# EAGLE board motherboard (EAGLE 5.10)
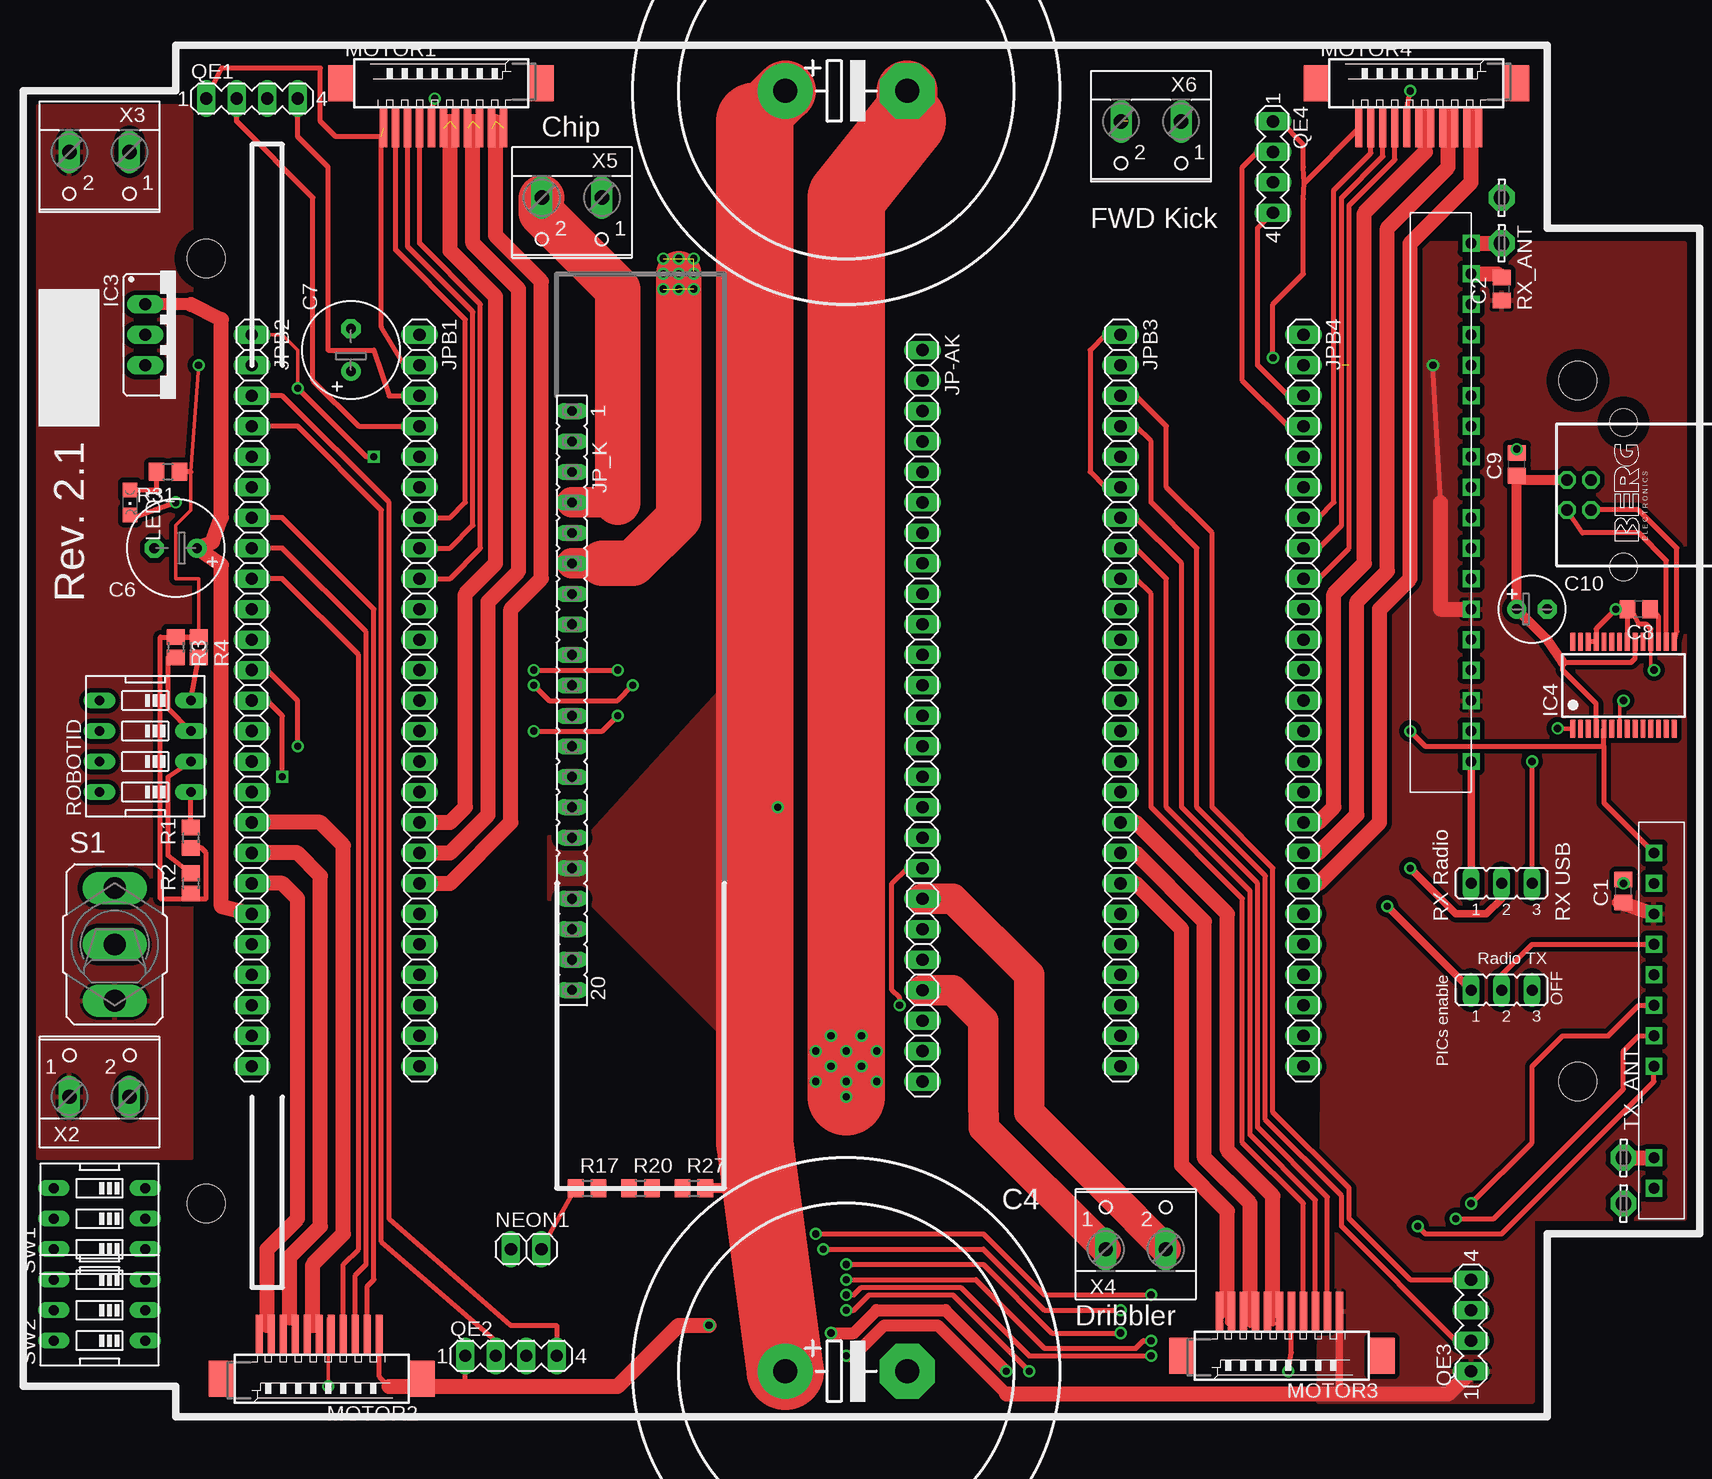
[diagram p0: board, top side]
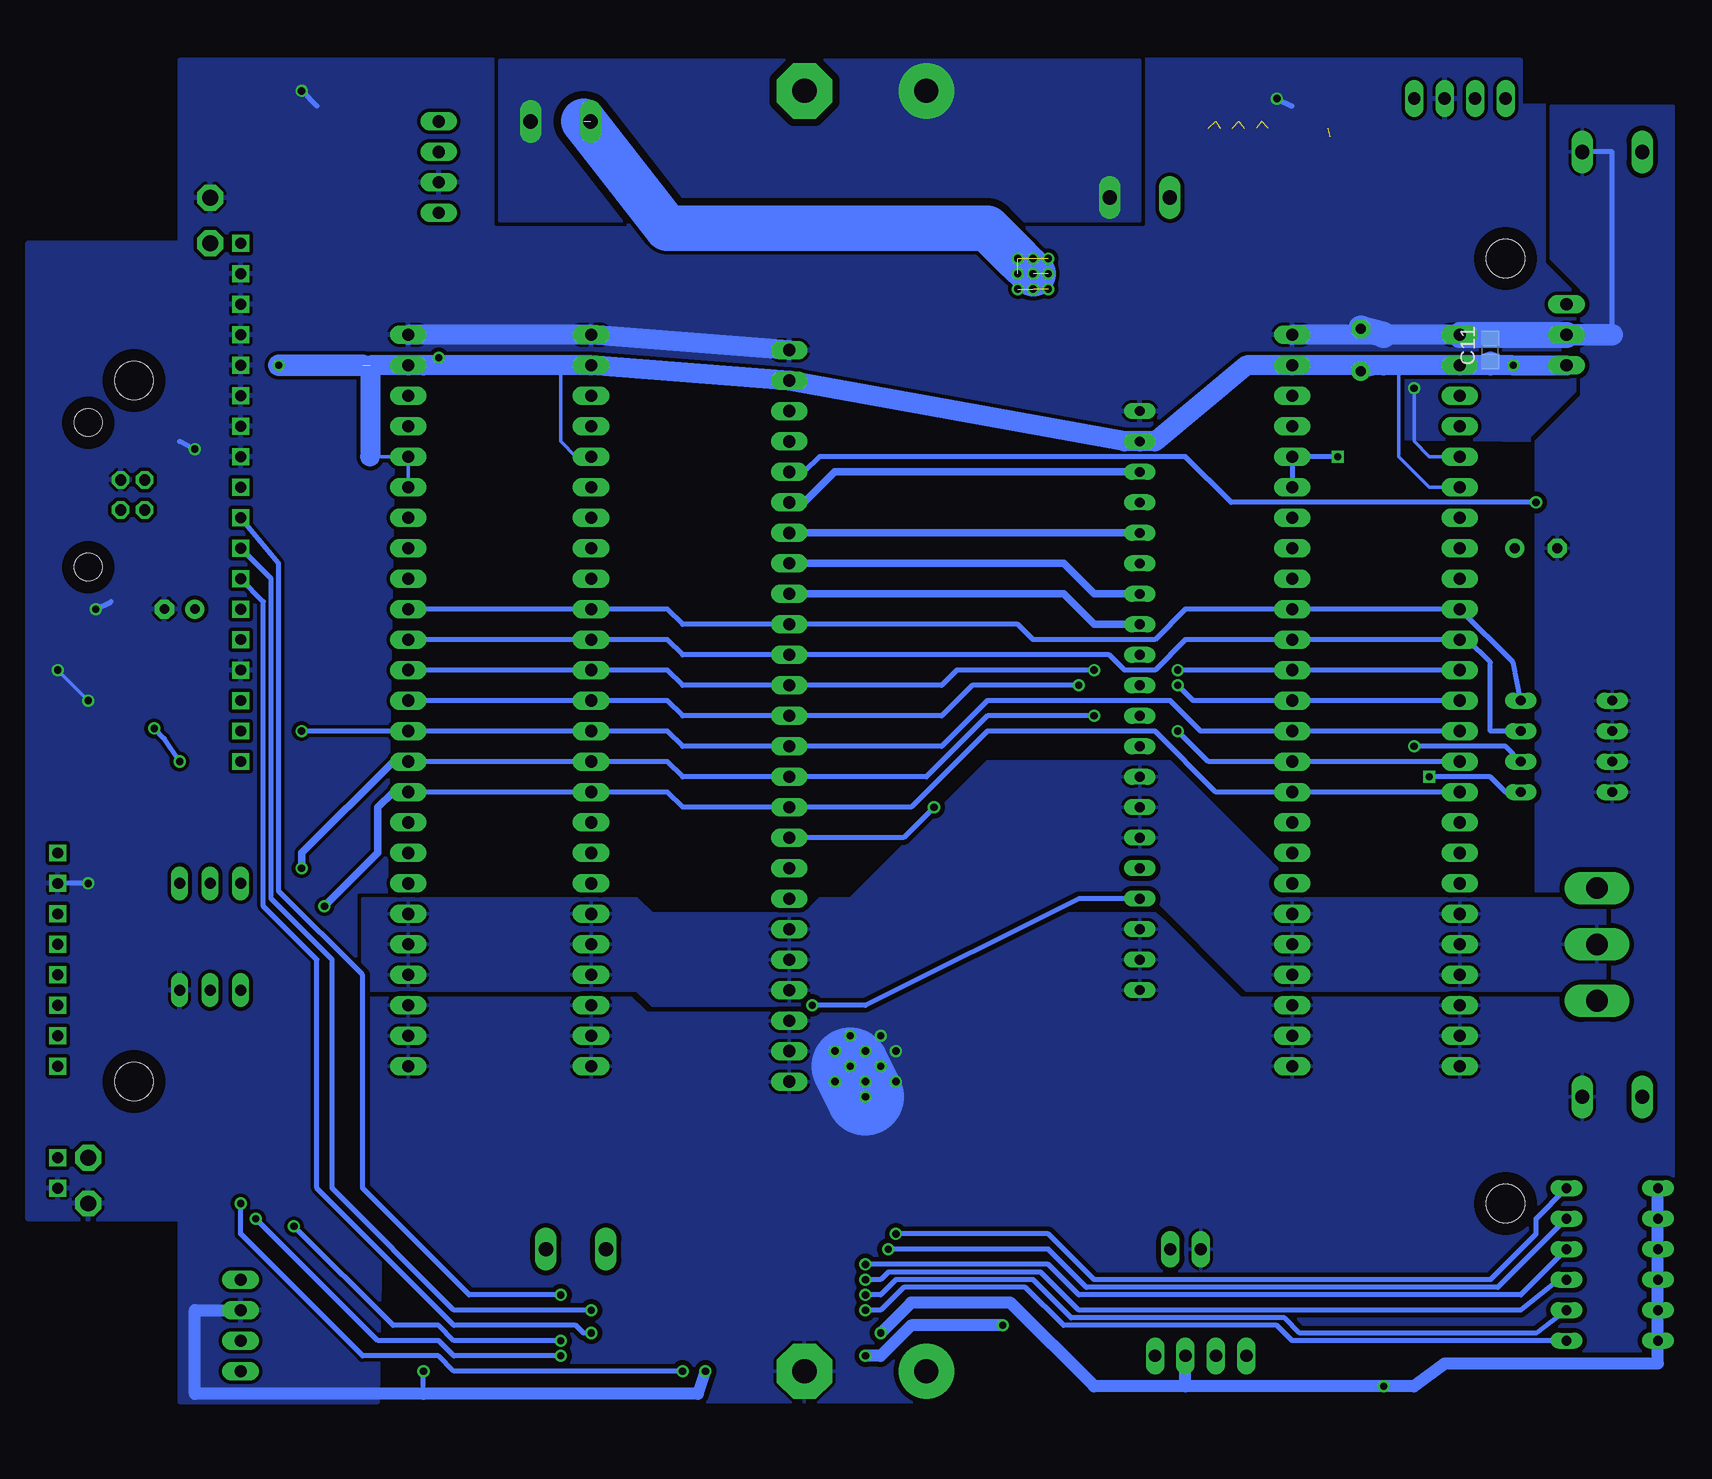
[diagram p1: board, bottom side, seen from below]

No outline drawn. Coordinates in mm, seen from the top.
Copper layers (1*16): Top 0.035mm / dielectric 1.5mm / Bottom 0.035mm
Design rules "default *": minimum track width 10mil, minimum drill 24mil, track to track 8mil, track to pad 8mil, pad to pad 8mil, via to via 8mil, smd to smd 8mil, copper to edge 40mil, drill to drill 8mil, minimum pad ring 10mil, minimum via ring 8mil, stop-mask expansion 4mil, vias tented up to drill 0mil, thermal gap 10mil
Net classes: 1 supply: width 0.508 mm; 2 motor: width 0.508 mm
Holes 3.17 mm at 129.54,86.36 129.54,27.94 15.24,17.78 15.24,96.52

## Footprints (pad centres in the part's own frame; a part is rotated, then mirrored left to right if it is on the bottom)
C0805 = smd 1.3 x 1.5: 1 -0.95,0; 2 0.95,0
EB35D = drill 2.007 pad 4.597 round: + -5.08,0 | drill 2.007 pad 4.597 octagon: - 5.08,0
E3,5-8 = drill 0.813 pad 1.6 round: + -1.778,0 | drill 0.813 pad 1.6 octagon: - 1.778,0
E2,5-6 = drill 0.813 pad 1.6 round: + -1.27,0 | drill 0.813 pad 1.6 octagon: - 1.27,0
78XXS = drill 1.016 long: GND 0,-2.54; IN -2.54,-2.54; OUT 2.54,-2.54
SSOP28 = smd 0.4 x 1.5: 1 -4.225,-3.625; 2 -3.575,-3.625; 3 -2.925,-3.625; 4 -2.275,-3.625; 5 -1.625,-3.625; 6 -0.975,-3.625; 7 -0.325,-3.625; 8 0.325,-3.625; 9 0.975,-3.625; 10 1.625,-3.625; 11 2.275,-3.625; 12 2.925,-3.625; 13 3.575,-3.625; 14 4.225,-3.625; 15 4.225,3.625; 16 3.575,3.625; 17 2.925,3.625; 18 2.275,3.625; 19 1.625,3.625; 20 0.975,3.625; 21 0.325,3.625; 22 -0.325,3.625; 23 -0.975,3.625; 24 -1.625,3.625; 25 -2.275,3.625; 26 -2.925,3.625; 27 -3.575,3.625; 28 -4.225,3.625
JP2 = drill 0.914 long: 1 -2.54,0; 2 0,0; 3 2.54,0
1X25 = drill 1.016 long: 1 -29.21,0; 2 -26.67,0; 3 -24.13,0; 4 -21.59,0; 5 -19.05,0; 6 -16.51,0; 7 -13.97,0; 8 -11.43,0; 9 -8.89,0; 10 -6.35,0; 11 -3.81,0; 12 -1.27,0; 13 1.27,0; 14 3.81,0; 15 6.35,0; 16 8.89,0; 17 11.43,0; 18 13.97,0; 19 16.51,0; 20 19.05,0; 21 21.59,0; 22 24.13,0; 23 26.67,0; 24 29.21,0; 25 31.75,0
FE20 = drill 0.813 long: 1 -24.13,0; 2 -21.59,0; 3 -19.05,0; 4 -16.51,0; 5 -13.97,0; 6 -11.43,0; 7 -8.89,0; 8 -6.35,0; 9 -3.81,0; 10 -1.27,0; 11 1.27,0; 12 3.81,0; 13 6.35,0; 14 8.89,0; 15 11.43,0; 16 13.97,0; 17 16.51,0; 18 19.05,0; 19 21.59,0; 20 24.13,0
CHIPLED_0805 = smd 1.2 x 1.2: A 0,-1.05; C 0,1.05
53261-11 = smd 0.6 x 3.2: P$1 -3,-3.1; P$2 -2,-3.1; P$3 -1,-3.1; P$4 0,-3.1; P$5 1,-3.1; P$6 2,-3.1; P$7 3,-3.1; P$8 4,-3.1; P$9 5,-3.1; P$10 6,-3.1; P$11 7,-3.1 | smd 2.1 x 3: S1 10.15,0.625; S2 -6.55,0.625
1X02 = drill 1.016 long: 1 -1.27,0; 2 1.27,0
MA04-1 = drill 1.016 long: 1 -3.81,0; 2 -1.27,0; 3 1.27,0; 4 3.81,0
R0805 = smd 1.3 x 1.5: 1 -0.85,0; 2 0.85,0
R0805' = smd 1.3 x 1.5: 1 -0.95,0; 2 0.95,0
EDG-04 = drill 0.813 long: 1 -3.81,-3.81; 2 -1.27,-3.81; 3 1.27,-3.81; 4 3.81,-3.81; 5 3.81,3.81; 6 1.27,3.81; 7 -1.27,3.81; 8 -3.81,3.81
LSP13 = drill 1.321 pad 2.159 octagon: MP 0,0
M9040P = drill 1.803 long: 1 0,4.699; 2 0,0; 3 0,-4.699
EDG-03 = drill 0.813 long: 1 -2.54,-3.81; 2 0,-3.81; 3 2.54,-3.81; 4 2.54,3.81; 5 0,3.81; 6 -2.54,3.81
SIP-18 = drill 0.9 square: P$1 2.54,0; P$2 5.08,0; P$3 7.62,0; P$4 10.16,0; P$5 12.7,0; P$6 15.24,0; P$7 17.78,0; P$8 20.32,0; P$9 22.86,0; P$10 25.4,0; P$11 27.94,0; P$12 30.48,0; P$13 33.02,0; P$14 35.56,0; P$15 38.1,0; P$16 40.64,0; P$17 43.18,0; P$18 45.72,0
SIP-10 = drill 0.9 square: P$1 2.54,0; P$2 5.08,0; P$3 12.7,0; P$4 15.24,0; P$5 17.78,0; P$6 20.32,0; P$7 22.86,0; P$8 25.4,0; P$9 27.94,0; P$10 30.48,0
PN61729 = drill 0.95 octagon: 1 1.25,4.71; 2 -1.25,4.71; 3 -1.25,2.71; 4 1.25,2.71 | hole 2.3: -6.02,0; 6.02,0
W237-102 = drill 1.194 long: 1 -2.5,-1.27; 2 2.5,-1.27

## Placement (x,y rotation side)
C1  [C0805]  133.35,43.81 90 top
C2  [C0805]  123.19,93.98 90 top
C3  [EB35D]  68.58,110.49 0 top
C4  [EB35D]  68.58,3.81 0 top
C6  [E3,5-8]  12.7,72.39 180 top
C7  [E3,5-8]  27.3,88.9 90 top
C8  [C0805]  134.62,67.31 180 top
C9  [C0805]  124.46,79.38 90 top
C10  [E2,5-6]  125.73,67.31 0 top
C11  [C0805]  16.51,88.9 90 bottom
IC3  [78XXS]  12.7,90.17 270 top
IC4  FT232RL  [SSOP28]  133.35,60.96 0 top
JP1  [JP2]  123.19,44.45 0 top
JP2  [JP2]  123.19,35.56 0 top
JP-AK  [1X25]  74.93,59.69 270 top
JP_K  [FE20]  45.72,59.69 270 top
JPB1  [1X25]  33.02,60.96 270 top
JPB2  [1X25]  19.05,60.96 270 top
JPB3  [1X25]  91.44,60.96 270 top
JPB4  [1X25]  106.68,60.96 270 top
LED1  [CHIPLED_0805]  8.89,76.2 180 top
MOTOR1  [53261-11]  33.02,110.49 0 top
MOTOR2  [53261-11]  26.67,3.81 180 top
MOTOR3  [53261-11]  106.68,5.71 180 top
MOTOR4  [53261-11]  114.3,110.49 0 top
NEON1  [1X02]  41.91,13.97 0 top
QE1  [MA04-1]  19.05,109.86 0 top
QE2  [MA04-1]  40.64,5.08 0 top
QE3  [MA04-1]  120.65,7.62 90 top
QE4  [MA04-1]  104.14,104.14 270 top
R1  7k  [R0805]  13.97,48.26 90 top
R2  [R0805]  13.97,44.45 90 top
R3  [R0805]  12.7,64.14 270 top
R4  [R0805]  14.61,64.14 270 top
R17  [R0805']  46.99,19.05 0 top
R20  [R0805']  51.44,19.05 0 top
R27  [R0805']  55.88,19.05 0 top
R31  220  [R0805']  12.06,78.74 180 top
ROBOTID  [EDG-04]  10.16,55.88 90 top
RX_ANT  LSP13  [LSP13]  123.19,97.79 270 top
RX_ANT1  LSP13  [LSP13]  123.19,101.6 90 top
S1  [M9040P]  7.62,39.37 0 top
SW1  [EDG-03]  6.35,16.51 90 top
SW2  [EDG-03]  6.35,8.89 90 top
TX_ANT  LSP13  [LSP13]  133.35,21.59 90 top
TX_ANT_GND  LSP13  [LSP13]  133.35,17.78 90 top
U$1  RXM-900-HP3-PPS  [SIP-18]  120.65,100.33 270 top
U$2  TXM-900-HP3-PPO  [SIP-10]  135.89,16.51 90 top
X1  [PN61729]  133.35,76.83 90 top
X2  [W237-102]  6.35,27.94 0 top
X3  [W237-102]  6.35,104.14 180 top
X4  [W237-102]  92.71,15.24 0 top
X5  [W237-102]  45.72,100.33 180 top
X6  [W237-102]  93.98,106.68 180 top

## Library data of the parts
C1-C4 C6-C11 R17 R20 R27 R31 = rcl
IC3 = v-reg
IC4 = ftdichip
JP1 JP2 = jumper
JP-AK JPB1-JPB4 NEON1 = pinhead
JP_K = con-lsta
LED1 = led
MOTOR1-MOTOR4 = brushless
QE1-QE4 = con-lstb
R1-R4 = quantum-sensor
ROBOTID SW1 SW2 = special
RX_ANT RX_ANT1 TX_ANT TX_ANT_GND = solpad
S1 = switch
U$1 U$2 = rfc
X1 = con-berg
X2-X6 = con-wago-500

## Nets
+5V: C1.1 C2.1 C7.+ C11.1 IC3.OUT JP-AK.2 JP_K.2 JPB1.2 JPB2.2 JPB2.6 JPB3.2 JPB3.5 JPB4.2 JPB4.5 JPB4.6 MOTOR1.P$1 MOTOR2.P$1 MOTOR3.P$1 MOTOR4.P$1 QE1.1 QE2.1 QE3.1 QE4.1 R1.1 R2.1 R3.1 R4.1 R31.1 U$1.P$13 U$1.P$16 U$2.P$8
BATT2+: S1.3 X2.1 X3.2
BBEMVO: JP-AK.4
BBTRVO: JP-AK.3
BOTID0: JP-AK.10 JPB1.10 JPB2.10 JPB3.10 JPB4.10 R4.2 ROBOTID.4
BOTID1: JP-AK.11 JPB1.11 JPB2.11 JPB3.11 JPB4.11 R3.2 ROBOTID.3
BOTID2: JP-AK.12 JPB1.12 JPB2.12 JPB3.12 JPB4.12 R2.2 ROBOTID.2
BOTID3: JP-AK.13 JPB1.13 JPB2.13 JPB3.13 JPB4.13 R1.2 ROBOTID.1
CAP+: C3.+ C4.+ JP-AK.17 JP_K.16 R27.2 X5.1 X6.1
CHARGE: JP-AK.8 JP_K.7
CHIPKICK: JP-AK.6 JP_K.3
CHIPSOL-: JP_K.4 X5.2
DISCHARGE: JP-AK.18 JP_K.17
DONE: JP-AK.9 JP_K.8
DRIB-: JP-AK.19 X4.2
FWDKICK: JP-AK.7 JP_K.5
FWDSOL-: JP_K.6 X6.2
GND: C1.2 C2.2 C7.- C8.2 C9.2 C10.- C11.2 IC3.GND IC4.7 IC4.18 IC4.21 IC4.25 IC4.26 JP2.3 JP-AK.1 JP_K.1 JPB1.1 JPB1.5 JPB1.6 JPB2.1 JPB2.5 JPB3.1 JPB3.6 JPB4.1 MOTOR1.P$5 MOTOR2.P$5 MOTOR3.P$5 MOTOR4.P$5 QE1.3 QE2.3 QE3.3 QE4.3 RX_ANT1.MP SW1.4 SW1.5 SW1.6 SW2.4 SW2.5 SW2.6 TX_ANT_GND.MP U$1.P$2 U$1.P$3 U$1.P$4 U$1.P$5 U$1.P$6 U$1.P$7 U$1.P$8 U$1.P$15 U$2.P$1 U$2.P$9 X1.4
LED1: JP-AK.5 LED1.C
M1H1: JPB1.8 MOTOR1.P$3
M1H2: JPB1.9 MOTOR1.P$4
M1H3: JPB1.7 MOTOR1.P$2
M1P1: JPB1.19 MOTOR1.P$10 MOTOR1.P$11
M1P2: JPB1.18 MOTOR1.P$8 MOTOR1.P$9
M1P3: JPB1.17 MOTOR1.P$6 MOTOR1.P$7
M2H1: JPB2.8 MOTOR2.P$3
M2H2: JPB2.9 MOTOR2.P$4
M2H3: JPB2.7 MOTOR2.P$2
M2P1: JPB2.19 MOTOR2.P$10 MOTOR2.P$11
M2P2: JPB2.18 MOTOR2.P$8 MOTOR2.P$9
M2P3: JPB2.17 MOTOR2.P$6 MOTOR2.P$7
M3H1: JPB3.8 MOTOR3.P$3
M3H2: JPB3.9 MOTOR3.P$4
M3H3: JPB3.7 MOTOR3.P$2
M3P1: JPB3.19 MOTOR3.P$10 MOTOR3.P$11
M3P2: JPB3.18 MOTOR3.P$8 MOTOR3.P$9
M3P3: JPB3.17 MOTOR3.P$6 MOTOR3.P$7
M4H1: JPB4.8 MOTOR4.P$3
M4H2: JPB4.9 MOTOR4.P$4
M4H3: JPB4.7 MOTOR4.P$2
M4P1: JPB4.19 MOTOR4.P$10 MOTOR4.P$11
M4P2: JPB4.18 MOTOR4.P$8 MOTOR4.P$9
M4P3: JPB4.17 MOTOR4.P$6 MOTOR4.P$7
N$2: C9.1 C10.+ IC4.4 IC4.20 X1.1
N$3: LED1.A R31.2
N$13: RX_ANT.MP U$1.P$1
N$14: TX_ANT.MP U$2.P$2
N$16: JP2.2 U$2.P$7
N$17: C8.1 IC4.17
N$18: IC4.15 X1.3
N$19: IC4.16 X1.2
N$21: R17.2 R20.1
N$27: R20.2 R27.1
N$31: NEON1.2 R17.1
PE: C3.- C4.- C6.- JP-AK.23 JP-AK.24 JP-AK.25 JP_K.18 JP_K.19 JP_K.20 JPB1.23 JPB1.24 JPB1.25 JPB2.23 JPB2.24 JPB2.25 JPB3.23 JPB3.24 JPB3.25 JPB4.23 JPB4.24 JPB4.25 NEON1.1 ROBOTID.5 ROBOTID.6 ROBOTID.7 ROBOTID.8 X2.2 X3.1
QEA1: JPB1.4 QE1.2
QEA2: JPB2.4 QE2.2
QEA3: JPB3.4 QE3.2
QEA4: JPB4.4 QE4.2
QEB1: JPB1.3 QE1.4
QEB2: JPB2.3 QE2.4
QEB3: JPB3.3 QE3.4
QEB4: JPB4.3 QE4.4
RADIORX: JP1.1 U$1.P$18
RX: JP1.2 JP-AK.15 JPB1.15 JPB2.15 JPB3.15 JPB4.15
RXCS0: SW1.3 U$1.P$10
RXCS1: SW1.2 U$1.P$11
RXCS2: SW1.1 U$1.P$12
TX: IC4.5 JP-AK.14 JPB1.14 JPB2.14 JPB3.14 JPB4.14 U$2.P$10
TXCS0: SW2.3 U$2.P$3
TXCS1: SW2.2 U$2.P$4
TXCS2: SW2.1 U$2.P$5
TXEN: JP2.1 JP-AK.16 JPB1.16 JPB2.16 JPB3.16 JPB4.16
USBRX: IC4.1 JP1.3
V+: C6.+ IC3.IN JP-AK.20 JP-AK.21 JP-AK.22 JP_K.13 JP_K.14 JP_K.15 JPB1.20 JPB1.21 JPB1.22 JPB2.20 JPB2.21 JPB2.22 JPB3.20 JPB3.21 JPB3.22 JPB4.20 JPB4.21 JPB4.22 S1.2 X4.1

## Tracks (layer width: path | path; a pad name or v marks a point on that pad's centre or on a via)
+5V  (via drill 0.6, 0.6 pad 0.61)  (2 unrouted)
  Top 0.305: R4.1 14.61,69.85 12.7,69.85 12.7,74.3 13.97,75.56 13.97,78.74 v14.61,87.63
  Top 0.406: 76.19,86.46 75.03,86.46 JP-AK.2 | 106.73,102.82 106.68,101.5 106.68,95.25 104.14,92.71 v104.14,88.27 | 106.73,102.82 MOTOR4.P$1 | QE4.1 104.78,107.95 106.68,106.05 106.68,104.14 106.73,102.82 | QE1.1 16.51,112.39 24.77,112.39 24.77,107.95 26.04,106.68 29.84,106.68 29.84,90.81 31.75,87.63 JPB1.2 | R3.1 R4.1 11.43,64.98 11.43,43.18 13.76,43.18 R2.1 | MOTOR2.P$1 29.67,3.35 30.48,2.54 | 36.83,2.54 QE2.1 | 118.11,76.2 v117.47,87.63 | 13.97,78.74 R31.1 | R2.1 13.97,44.03 | R1.1 14.82,47.41 15.24,46.99 15.24,43.18 14.19,43.18 R2.1
  Top 0.61: MOTOR3.P$1 109.68,2.37 109.22,1.91
  Top 1.016: 81.92,1.91 76.2,7.62 71.75,7.62 69.22,5.08 v68.58,5.08
  Top 1.27: 30.48,2.54 36.83,2.54 49.53,2.54 54.61,7.62 v57.15,7.62 | QE3.1 118.75,1.91 109.22,1.91 81.92,1.91 | U$2.P$8 133.03,42.87 C1.1 | 118.11,76.2 118.11,67.31 U$1.P$13
  Bottom 0.305: 109.86,80.01 JPB4.5 JPB4.6 | JPB3.5 92.71,80.01 93.98,81.28 93.98,87.63 | JPB2.6 21.59,77.47 24.13,80.01 24.13,87.63
  Bottom 0.406: v104.14,88.27 104.78,88.27 105.41,87.63
  Bottom 1.016: v57.15,7.62 64.77,7.62 67.31,5.08 v68.58,5.08
  Bottom 1.27: 25.4,87.63 C7.+
  Bottom 1.676: 109.86,80.01 109.86,87.63 JPB4.2 105.41,87.63 93.98,87.63 JPB3.2 JP-AK.2 46.99,81.28 JP_K.2 44.45,81.28 36.83,87.63 JPB1.2 25.4,87.63 24.13,87.63 JPB2.2 16.51,87.63 | 16.51,87.63 v14.61,87.63 IC3.OUT | 16.51,87.63 C11.1
  Bottom 1.778: v117.47,87.63 110.49,87.63
  pour Top (isolate 0.406): 109.22,97.79 138.43,97.79 138.43,16.51 125.73,16.51 125.73,1.27 107.95,1.27
BATT2+
  pour Top (isolate 0.406, rank 2): 1.27,109.22 13.97,109.22 13.97,21.59 1.27,21.59
BBTRVO
  Top 0.406: JP-AK.3 76.2,83.82
BOTID0
  Top 0.406: ROBOTID.4 R4.2
  Bottom 0.406: ROBOTID.4 14.61,62.87 JPB2.10 JPB1.10 41.91,67.31 44.45,64.77 54.61,64.77 55.88,66.04 JP-AK.10 83.82,66.04 85.09,67.31 JPB3.10 JPB4.10
BOTID1
  Top 0.406: ROBOTID.3 12.06,59.05 12.06,63.28 R3.2
  Bottom 0.406: ROBOTID.3 16.51,57.15 16.51,62.87 18.41,64.77 JPB2.11 JPB1.11 41.91,64.77 44.45,62.23 46.99,62.23 48.26,63.5 JP-AK.11 83.82,63.5 85.09,64.77 JPB3.11 JPB4.11
BOTID2  (via drill 0.6)
  Top 0.406: v42.55,62.23 v49.53,62.23 | ROBOTID.2 12.06,53.34 12.06,46.77 R2.2 | v22.86,55.88 22.86,59.69 20.32,62.23 JPB2.12
  Bottom 0.406: JPB2.12 JPB1.12 v42.55,62.23 | v49.53,62.23 60.96,62.23 62.23,60.96 JP-AK.12 83.82,60.96 85.09,62.23 JPB3.12 JPB4.12 | ROBOTID.2 15.24,55.88 v22.86,55.88
BOTID3  (via drill 0.6)
  Top 0.406: v42.55,60.96 43.81,59.69 49.53,59.69 v50.8,60.96 | v21.59,53.34 21.59,58.42 20.32,59.69 JPB2.13 | R1.2 ROBOTID.1
  Bottom 0.406: JPB2.13 JPB1.13 41.27,59.69 v42.55,60.96 | v50.8,60.96 59.69,60.96 62.23,58.42 JP-AK.13 83.82,58.42 85.09,59.69 JPB3.13 JPB4.13 | ROBOTID.1 15.24,52.07 16.51,53.34 v21.59,53.34
CAP+  (via drill 0.6)
  Top 0.406: v62.87,50.8 62.23,53.34 62.23,52.07 60.96,50.8
  Top 0.813: R27.2 58.56,19.05 61.13,21.61
  Top 5.08: 60.96,107.95 C3.+
  Top 6.452: 60.96,107.95 60.96,50.8 60.96,22.86 61.13,21.61 C4.+
  Bottom 0.406: v62.87,50.8 65.41,48.26 JP-AK.17
  pour Bottom (isolate 0.61, no thermals): 45.72,113.03 99.06,113.03 99.06,99.69 45.72,99.69
  pour Top (isolate 0.406, rank 2, no thermals): 43.81,43.18 46.99,43.18 60.96,29.21 60.96,67.31 59.69,62.23 46.99,48.26 43.81,48.26
CHARGE
  Bottom 0.61: JP_K.7 49.53,68.58 52.07,71.12 JP-AK.8
CHIPKICK
  Bottom 0.61: JP-AK.6 73.66,76.2 71.12,78.74 JP_K.3
CHIPSOL-
  Top 2.54: JP_K.4 49.53,76.2
  Top 3.81: 49.53,76.2 49.53,93.98 43.18,100.33 43.18,101.56 X5.2
DISCHARGE  (via drill 0.6)
  Top 0.406: JP-AK.18 73.66,45.72 72.39,44.45 72.39,35.56 73.03,34.92 v73.03,34.29
  Bottom 0.406: v73.03,34.29 68.58,34.29 50.8,43.18 JP_K.17
DONE
  Bottom 0.61: JP-AK.9 52.07,68.58 49.53,66.04 JP_K.8
DRIB-
  Top 2.54: X4.2 90.13,19.09 83.82,25.4 83.82,36.83 77.47,43.18 JP-AK.19
FWDKICK
  Bottom 0.61: JP_K.5 JP-AK.7
FWDSOL-  (via drill 0.6)  (7 unrouted)
  Top 2.54: JP_K.6 48.26,71.12
  Top 3.81: 48.26,71.12 50.8,71.12 54.61,74.93 v54.61,93.98 v54.61,95.25
  Bottom 3.81: v54.61,95.25 v55.88,96.52 58.42,99.06 85.09,99.06 92.03,107.95
  other vias: 53.34,93.98 53.34,96.52 53.34,95.25 54.61,96.52 55.88,95.25 55.88,93.98
GND  (via drill 0.6, 0.6 pad 0.61)
  Top 0.305: MOTOR2.P$5 25.4,8.18 v25.4,2.54 | v22.86,85.72 22.86,88.9 21.59,90.17 JPB2.1 | IC4.7 133.03,59.37 v133.35,59.69 | IC4.18 135.62,62.49 v135.89,62.23
  Top 0.406: MOTOR4.P$5 115.3,108.95 v115.57,110.49 | MOTOR1.P$5 34.02,108.95 v34.29,109.86 | IC4.26 IC4.25 131.07,65.67 v132.72,67.31 133.37,67.31 133.68,67 | IC4.18 135.62,65.67 135.25,66.04 134.62,66.04 133.99,67.31 | 133.99,67.31 133.99,67.63 C8.2 | 133.68,67 IC4.21 | 133.99,67.31 133.68,67 | C9.2 v124.46,80.64 | MOTOR3.P$5 105.68,5.35 v105.41,3.81 | v29.21,80.01 28.57,80.01 v22.86,85.72 | JPB3.6 90.17,77.47 88.9,78.74 88.9,88.9 90.17,90.17 JPB3.1 | C1.2 v133.35,44.45
  Top 1.016: v67.31,6.99 69.22,6.99 71.12,8.89 76.83,8.89 v81.92,3.81
  Top 1.27: U$1.P$2 122.87,95.25 C2.2
  Bottom 0.305: JPB2.5 21.59,80.01 22.86,81.28 v22.86,85.72 | v133.35,59.69 v135.89,62.23
  Bottom 0.406: v115.57,110.49 114.3,109.22 | v34.29,109.86 33.02,109.22 | v124.46,80.64 125.73,81.28 | v132.72,67.31 131.44,67.94 | 105.41,1.91 v105.41,3.81 | JPB1.6 JPB1.5 v29.21,80.01 | v133.35,44.45 U$2.P$9 | SW1.4 SW1.5 SW1.6 SW2.4 | SW2.6 SW2.5
  Bottom 1.016: SW1.4 SW1.5 SW1.6 SW2.4 SW2.5 SW2.6 2.54,4.45 20.32,4.45 22.86,2.54 v25.4,2.54 41.91,2.54 | 41.91,2.54 49.53,2.54 56.52,9.53 64.77,9.53 v67.31,6.99 | v81.92,3.81 82.55,1.91 105.41,1.91 124.46,1.91 124.46,8.89 QE3.3 | 41.91,2.54 QE2.3
  Bottom 1.27: IC3.GND C11.2
  Bottom 1.676: JP-AK.1 JPB3.1 JPB4.1 | JPB2.1 25.4,90.17 JPB1.1
  Bottom 2.184: JPB2.1 IC3.GND | 25.4,90.17 C7.-
  pour Bottom (isolate 0.305, rank 6): 13.97,113.03 125.73,113.03 125.73,97.79 138.43,97.79 138.43,16.51 125.73,16.51 125.73,1.27 109.22,1.27 107.95,82.55 1.27,81.28 1.27,109.22 13.97,109.22
LED1  (via drill 0.6 pad 0.61)
  Top 0.406: v12.7,76.2 9.11,74.93 LED1.C
  Bottom 0.406: JP-AK.5 73.66,78.74 72.39,80.01 41.91,80.01 38.1,76.2 v12.7,76.2
M1H1
  Top 0.406: MOTOR1.P$3 32.02,97.52 37.47,92.08 37.47,74.3 35.56,72.39 JPB1.8
M1H2
  Top 0.406: MOTOR1.P$4 33.02,97.79 38.1,92.71 38.1,72.39 35.56,69.85 JPB1.9
M1H3
  Top 0.406: MOTOR1.P$2 31.02,97.25 36.83,91.44 36.83,76.2 35.56,74.93 JPB1.7
M1P1  (2 unrouted)
  Top 1.27: JPB1.19 35.56,44.45 40.64,49.53 40.64,67.31 43.18,69.85 43.18,94.61 39.37,98.42 39.37,107.95
M1P2  (2 unrouted)
  Top 1.27: JPB1.18 35.56,46.99 38.73,50.16 38.73,67.94 41.27,70.48 41.27,93.98 37.47,97.79 37.47,107.95
M1P3  (2 unrouted)
  Top 1.27: 35.56,107.95 35.56,97.16 39.37,93.34 39.37,71.12 36.83,68.58 36.83,50.8 35.56,49.53 JPB1.17
M2H1
  Top 0.406: JPB2.8 21.59,72.39 28.57,65.41 28.57,12.7 27.67,11.79 MOTOR2.P$3
M2H2
  Top 0.406: JPB2.9 21.59,69.85 27.94,63.5 27.94,13.97 26.67,12.7 MOTOR2.P$4
M2H3
  Top 0.406: JPB2.7 21.59,74.93 29.21,67.31 29.21,11.43 28.67,10.89 MOTOR2.P$2
M2P1
  Top 0.406: MOTOR2.P$11 19.76,8.18 20.32,7.62 20.67,7.97 MOTOR2.P$10
  Top 1.27: JPB2.19 21.59,44.45 22.86,43.18 22.86,16.51 20.32,13.97 20.32,7.62
M2P2
  Top 0.406: MOTOR2.P$8 22.59,8.26 22.23,8.26 21.75,8.26 MOTOR2.P$9
  Top 1.27: JPB2.18 22.86,46.99 24.77,45.09 24.77,15.88 22.23,13.34 22.23,8.26
M2P3
  Top 0.406: MOTOR2.P$7 24.13,7.72 24.13,7.62 24.13,7.64 MOTOR2.P$6
  Top 1.27: JPB2.17 24.77,49.53 26.67,47.62 26.67,15.24 24.13,12.7 24.13,7.62
M3H1
  Top 0.406: JPB3.8 92.71,72.39 95.25,69.85 95.25,50.8 102.23,43.81 102.23,23.5 107.68,18.05 MOTOR3.P$3
M3H2
  Top 0.406: MOTOR3.P$4 106.68,17.78 101.6,22.86 101.6,43.18 93.98,50.8 93.98,68.58 92.71,69.85 JPB3.9
M3H3
  Top 0.406: MOTOR3.P$2 108.68,18.32 102.87,24.13 102.87,44.45 96.52,50.8 96.52,71.12 92.71,74.93 JPB3.7
M3P1
  Top 0.406: MOTOR3.P$11 99.77,8.18 100.33,8.89 100.33,7.83 MOTOR3.P$10
  Top 1.27: JPB3.19 92.71,44.45 96.52,40.64 96.52,20.95 100.33,17.14 100.33,8.89
M3P2
  Top 0.406: MOTOR3.P$9 102.23,7.62 102.23,8.89 102.23,7.74 MOTOR3.P$8
  Top 1.27: JPB3.18 92.71,46.99 98.42,41.27 98.42,21.59 102.23,17.78 102.23,8.89
M3P3
  Top 0.406: MOTOR3.P$7 104.14,7.72 104.14,8.89 104.68,8.16 MOTOR3.P$6
  Top 1.27: JPB3.17 92.71,49.53 100.33,41.91 100.33,22.23 104.14,18.41 104.14,8.89
M4H1
  Top 0.406: JPB4.8 107.95,72.39 109.86,74.3 109.86,101.6 113.3,105.05 MOTOR4.P$3
M4H2
  Top 0.406: JPB4.9 107.95,69.85 110.49,72.39 110.49,100.97 114.3,104.78 MOTOR4.P$4
M4H3
  Top 0.406: JPB4.7 107.95,74.93 109.22,76.2 109.22,102.23 112.3,105.31 MOTOR4.P$2
M4P1
  Top 0.406: MOTOR4.P$10 120.65,106.47 120.95,106.47 MOTOR4.P$11
  Top 1.27: JPB4.19 107.95,44.45 113.03,49.53 113.03,67.31 115.57,69.85 115.57,97.79 120.65,102.87 120.65,106.47 120.65,108.58
M4P2
  Top 0.406: 118.75,108.58 118.38,106.05 MOTOR4.P$8 | MOTOR4.P$9 119.3,105.97 118.75,105.41
  Top 1.27: JPB4.18 107.95,46.99 111.12,50.16 111.12,67.94 113.67,70.48 113.67,99.06 118.75,104.14 118.75,105.41 118.75,108.58
M4P3
  Top 0.406: MOTOR4.P$7 117.3,106.22 116.84,108.58 116.3,106.14 MOTOR4.P$6
  Top 1.27: JPB4.17 107.95,49.53 109.22,50.8 109.22,68.58 111.76,71.12 111.76,100.33 116.84,105.41 116.84,108.58
N$2
  Top 0.406: C9.1 124.8,78.08 | IC4.20 134.32,63.2 133.99,62.87 128.27,62.87 128.27,62.23 131.07,59.42 IC4.4
  Top 0.813: 124.8,78.08 X1.1 | C9.1 C10.+ 127,64.77 128.27,62.87
N$3
  Top 0.406: LED1.A 11.12,77.25 R31.2
N$13
  Top 1.27: U$1.P$1 RX_ANT.MP
N$14
  Top 1.27: TX_ANT.MP U$2.P$2
N$16
  Top 0.406: JP2.2 123.19,36.83 125.73,39.37 U$2.P$7
N$17
  Top 0.406: C8.1 135.57,67.63 136.27,66.67 136.27,65.47 IC4.17
N$18
  Top 0.406: X1.3 134.6,75.58 137.79,72.39 137.79,65.44 IC4.15
N$19
  Top 0.406: IC4.16 136.93,71.36 134.62,73.66 129.93,73.66 X1.2
N$21
  Top 0.406: R17.2 R20.1
N$27
  Top 0.406: R20.2 R27.1
N$31
  Top 0.406: NEON1.2 R17.1
PE  (via drill 0.6)
  Top 5.08: 73.66,107.95 C3.-
  Top 6.452: v68.58,26.67 68.58,101.6 73.66,107.95
  Bottom 0.406: X3.1 6.35,105.41 6.35,90.17
  Bottom 1.778: 6.35,90.17 10.16,90.17
  Bottom 6.452: v68.58,26.67 v69.85,29.21
  other vias: 66.04,30.48 67.31,31.75 67.31,29.21 66.04,27.94 69.85,31.75 71.12,27.94 68.58,27.94 71.12,30.48 68.58,30.48
  pour Bottom (isolate 0.406, rank 2): 1.27,109.22 1.27,3.81 13.97,3.81 13.97,1.27 110.49,1.27 110.49,35.56 87.63,35.56 86.36,34.29 68.58,34.29 52.07,41.91 44.45,41.91 36.83,35.56 12.7,35.56 12.7,81.28 8.89,85.09 8.89,93.98 11.43,96.52 11.43,109.22
QEA1
  Top 0.406: JPB1.4 27.94,82.55 24.13,86.36 24.13,101.6 17.78,107.95 QE1.2
QEA2
  Top 0.406: JPB2.4 22.86,82.55 29.84,75.56 29.84,14.61 39.37,6.35 QE2.2
QEA3
  Top 0.406: JPB3.4 92.71,82.55 93.98,81.28 93.98,76.2 97.79,72.39 97.79,50.8 103.5,45.09 103.5,24.77 109.86,18.41 109.86,15.88 119.38,6.35 QE3.2
QEA4
  Top 0.406: QE4.2 102.87,105.41 101.6,104.14 101.6,86.36 105.41,82.55 JPB4.4
QEB1
  Top 0.406: QE1.4 22.86,106.68 25.4,104.14 25.4,88.9 29.21,88.9 30.48,85.09 JPB1.3
QEB2
  Top 0.406: QE2.4 44.45,7.62 40.64,7.62 30.48,16.51 30.48,76.2 21.59,85.09 JPB2.3
QEB3
  Top 0.406: JPB3.3 92.71,85.09 95.25,82.55 95.25,77.47 99.06,73.66 99.06,50.8 104.14,45.72 104.14,25.4 110.49,19.05 110.49,16.51 115.57,11.43 QE3.4
QEB4
  Top 0.406: QE4.4 102.87,99.06 102.87,87.63 105.41,85.09 JPB4.3
RADIORX
  Top 0.61: JP1.1 U$1.P$18
RX  (via drill 0.6)
  Top 0.406: v42.55,57.15 48.26,57.15 v49.53,58.42
  Top 0.61: v115.57,45.72 119.38,41.91 121.92,41.91 123.19,43.18 JP1.2
  Bottom 0.406: v42.55,57.15 40.01,54.61 JPB1.15 JPB2.15 | v49.53,58.42 58.42,58.42 63.5,53.34 JP-AK.15 83.82,53.34 85.09,54.61 JPB3.15 JPB4.15
  Bottom 0.61: JPB4.15 107.95,54.61 115.57,46.99 v115.57,45.72
RXCS0  (via drill 0.6 pad 0.61)
  Top 0.406: v66.04,15.24 80.01,15.24 85.09,10.16 v93.98,10.16
  Bottom 0.406: SW1.3 12.7,16.51 12.7,15.24 16.51,11.43 17.78,11.43 49.53,11.43 53.34,15.24 v66.04,15.24 | v93.98,10.16 101.6,10.16 110.49,19.05 110.49,36.83 117.47,43.81 117.47,71.12 U$1.P$10
RXCS1  (via drill 0.6 pad 0.61)
  Top 0.406: v66.67,13.97 80.01,13.97 85.09,8.89 v91.44,8.89
  Bottom 0.406: SW1.2 15.88,10.79 50.16,10.79 53.34,13.97 v66.67,13.97 | U$1.P$11 118.11,69.85 118.11,43.18 113.03,38.1 113.03,19.05 102.87,8.89 v91.44,8.89
RXCS2  (via drill 0.6 pad 0.61)
  Top 0.406: v68.58,12.7 80.01,12.7 85.72,6.99 v91.44,6.99
  Bottom 0.406: SW1.1 13.97,10.16 50.8,10.16 53.34,12.7 v68.58,12.7 | U$1.P$12 118.75,67.94 118.75,42.55 114.3,38.1 114.3,19.05 102.87,7.62 92.71,7.62 92.08,6.99 v91.44,6.99
TX  (via drill 0.6)
  Top 0.406: U$2.P$10 131.72,51.16 131.72,55.88 | 131.72,55.88 IC4.5 | v115.57,57.15 116.84,55.88 131.72,55.88
  Bottom 0.406: 85.09,57.15 83.82,55.88 JP-AK.14 62.23,55.88 58.42,59.69 43.18,59.69 40.64,57.15 JPB1.14 JPB2.14 | 85.09,57.15 JPB3.14 | 85.09,57.15 JPB4.14 v115.57,57.15
TXCS0  (via drill 0.6)
  Top 0.406: v68.58,11.43 79.38,11.43 85.09,5.71 92.71,5.71 93.34,6.35 v93.98,6.35 | v116.2,15.88 116.84,15.24 123.19,15.24 135.89,27.94 U$2.P$3
  Bottom 0.406: SW2.3 10.79,11.43 13.97,8.89 50.8,8.89 53.98,12.06 66.67,12.06 67.31,11.43 v68.58,11.43 | v93.98,6.35 102.87,6.35 104.14,7.62 107.95,7.62 v116.2,15.88
TXCS1  (via drill 0.6, 0.6 pad 0.61)
  Top 0.406: v68.58,10.16 69.22,10.16 69.85,10.79 78.11,10.79 83.82,5.08 v93.98,5.08 | v119.38,16.51 122.56,16.51 133.35,27.3 133.35,30.48 134.62,31.75 U$2.P$4
  Bottom 0.406: SW2.2 12.7,6.99 32.38,6.99 33.66,8.26 51.44,8.26 54.61,11.43 66.04,11.43 67.31,10.16 v68.58,10.16 | v93.98,5.08 102.87,5.08 104.14,6.35 109.22,6.35 v119.38,16.51
TXCS2  (via drill 0.6)
  Top 0.406: v68.58,8.89 69.22,8.89 70.48,10.16 77.47,10.16 v83.82,3.81 | v120.65,17.78 125.73,22.86 125.73,29.21 128.27,31.75 132.08,31.75 134.62,34.29 U$2.P$5
  Bottom 0.406: SW2.1 33.02,6.35 34.29,7.62 52.07,7.62 55.24,10.79 65.41,10.79 67.31,8.89 v68.58,8.89 | v83.82,3.81 102.87,3.81 104.14,5.08 110.49,5.08 120.65,15.24 v120.65,17.78
TXEN  (via drill 0.6)
  Top 0.61: v113.67,42.55 JP2.1
  Bottom 0.406: 85.09,52.07 83.82,50.8 JP-AK.16 64.77,50.8 58.42,57.15 44.45,57.15 39.37,52.07 JPB1.16 JPB2.16 | 85.09,52.07 JPB3.16 | 85.09,52.07 JPB4.16
  Bottom 0.61: JPB4.16 107.95,52.07 109.22,50.8 109.22,46.99 v113.67,42.55
USBRX  (via drill 0.6)
  Top 0.406: v127.86,57.37 IC4.1 | JP1.3 v125.73,54.61
  Bottom 0.406: v127.86,57.37 127,56.52 v125.73,54.61
V+
  Top 1.016: 13.97,92.71 IC3.IN
  Top 1.27: JPB2.20 16.51,42.55 16.51,70.99 C6.+ 15.75,72.9 16.51,74.93 16.51,91.44 13.97,92.71
  Top 2.54: X4.1 80.05,24.09 80.01,26.63 80.01,33.02 77.47,35.56 JP-AK.22
  pour Bottom (isolate 0.406): 6.99,43.18 34.29,43.18 34.29,45.72 43.18,54.61 58.42,54.61 69.85,43.18 72.39,43.18 73.66,41.91 86.36,41.91 87.63,43.18 110.49,43.18 110.49,35.56 87.63,35.56 86.36,34.29 68.58,34.29 50.8,43.18 44.45,43.18 36.83,35.56 6.99,35.56

## Text on the board
tNames: Chip | FWD Kick | Rev. 2.1 | RX Radio | RX USB | Radio TX | OFF | PICs enable | Dribbler